# Altium PCB SDR_PCB_V2.PcbDoc
Units mm, origin at the board's own origin, x right, y up, seen from the top; angles counter-clockwise.
Board outline 269.49 x 156.72 mm, 2 copper layers (Top Layer, Bottom Layer); 57 components, 87 nets, 305 pads, 3 vias.
Unrouted connection lines stored in the file: 1.
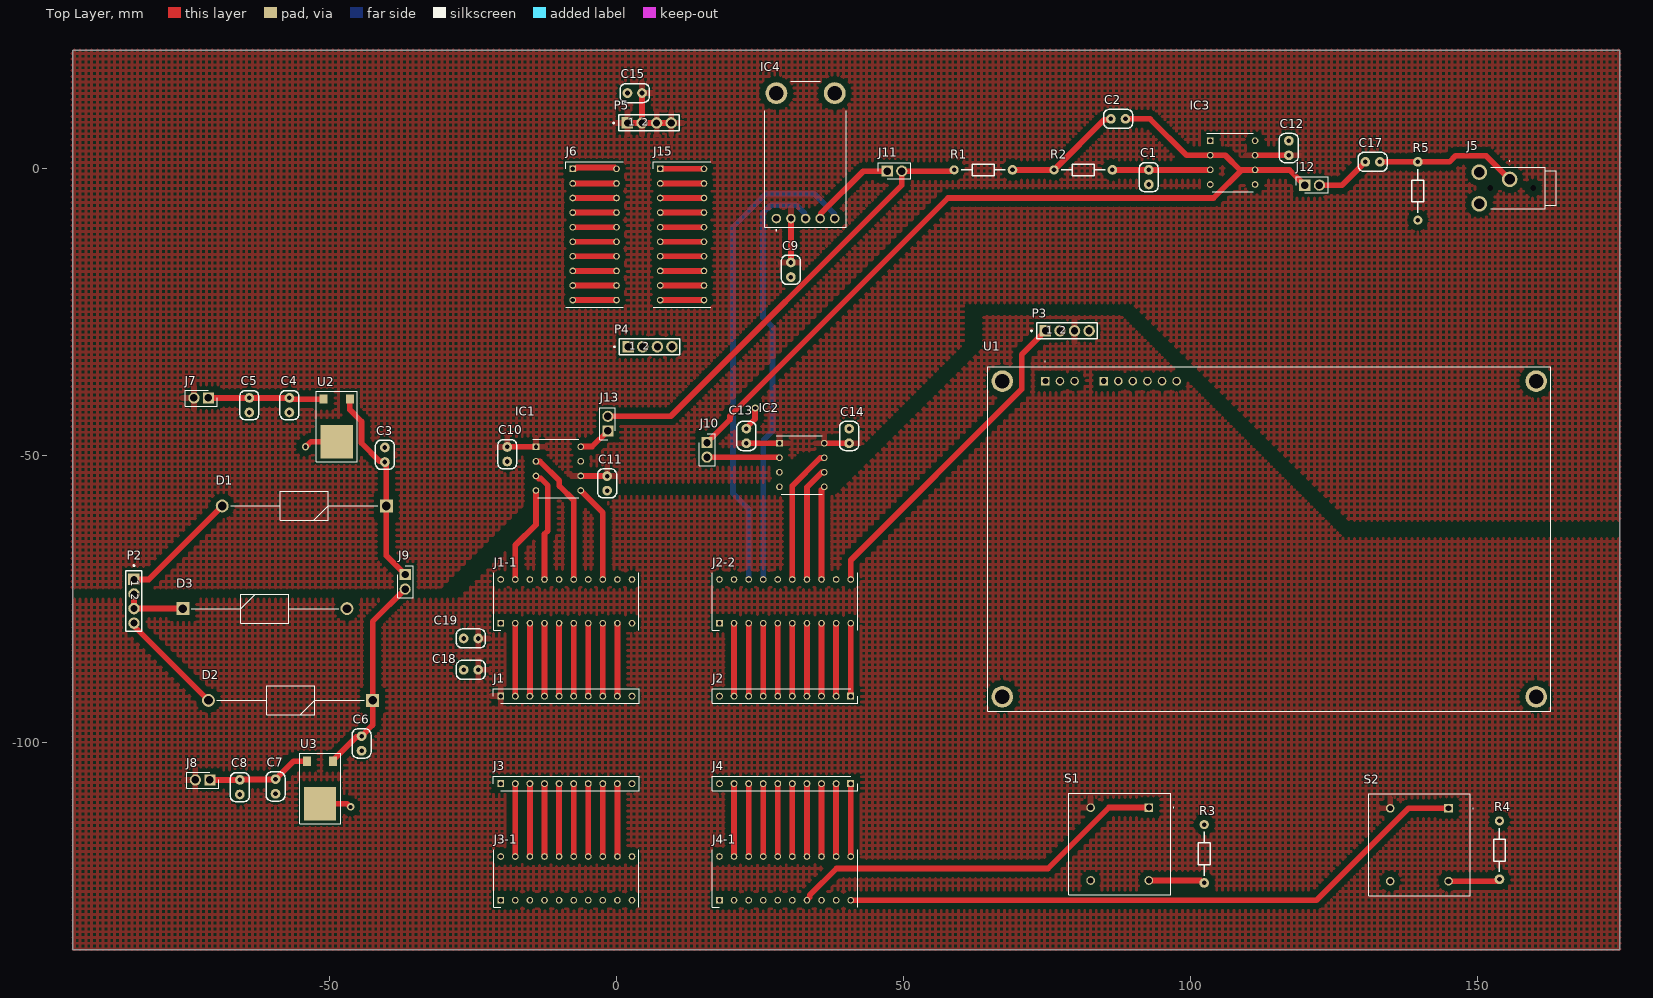
[diagram p0: Top Layer view]
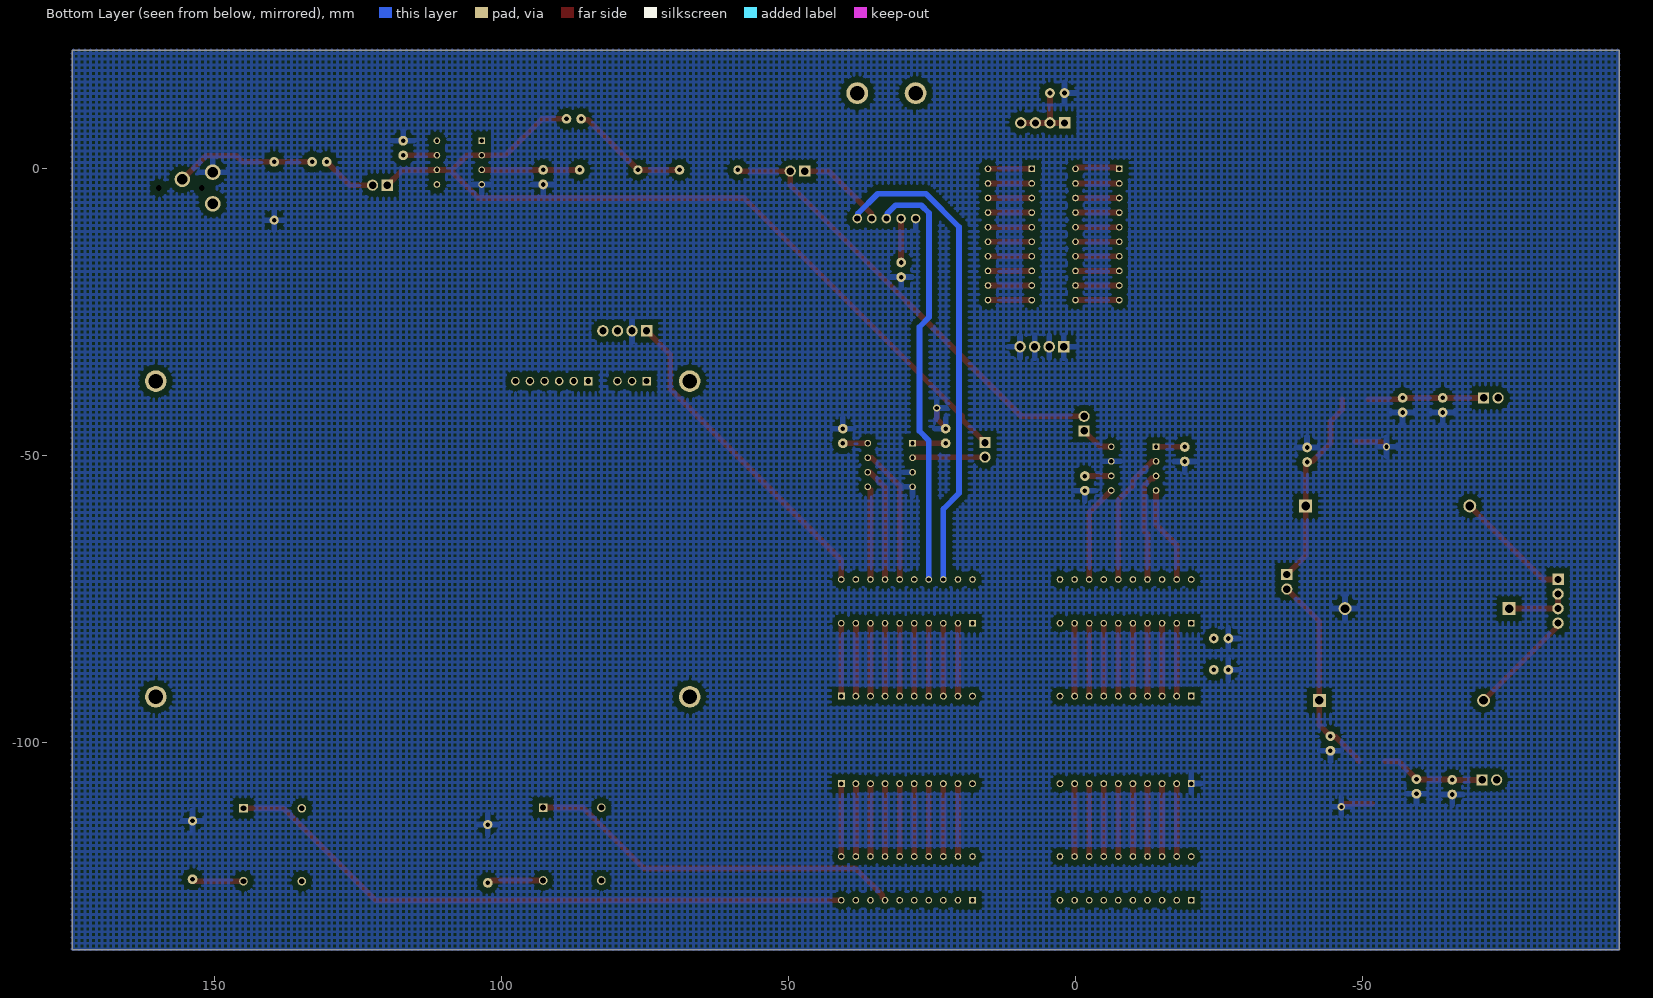
[diagram p1: Bottom Layer view, seen from below]

## Layer stack, top to bottom
Top Solder: solder mask 0.0102, Solder Resist, Dk 3.5
Top Layer: signal copper 0.0356
Dielectric 1: dielectric 0.32, FR-4, Dk 4.8
Bottom Layer: signal copper 0.0356
Bottom Solder: solder mask 0.0102, Solder Resist, Dk 3.5

## Board outline
-94.708,-136.036 174.786,-136.036 174.786,20.682 -94.708,20.682

## Design rules (kind name [scope] priority, off if disabled: settings)
Clearance [All] p1: gap=1 ignorepadtopadclearanceinfootprint=FALSE
ComponentClearance [All] p1: gap=0.3 collisioncheckmode=3 verticalgap=0.3 showdistances=FALSE
DiffPairsRouting [All] p1: maxlimit=1 minlimit=0.3 mostfreqgap=0.3 toplayer_minwidth=0.381 toplayer_maxwidth=0.381 toplayer_prefwidth=0.381 bottomlayer_minwidth=0.381 bottomlayer_maxwidth=0.381 bottomlayer_prefwidth=0.381 maxuncoupledlength=12.7
HoleSize [All] p1: absolutevalues=TRUE maxlimit=2.54 minlimit=0.6 maxpercent=80.000 minpercent=20.000
HoleToHoleClearance [All] p1: gap=0.3 allowstackedmicrovias=TRUE
PlaneClearance [All] p1: clearance=1
PlaneConnect [All] p1: planeconnectstyle=Relief reliefexpansion=1 reliefentries=4 reliefconductorwidth=1 reliefairgap=1
PolygonConnect [All] p1: connectstyle=Relief reliefconductorwidth=1 reliefentries=4 polygonreliefangle="90 Angle" airgapwidth=1
RoutingVias [All] p1: holewidth=0.711 width=1.27 viastyle="Through Hole" minholewidth=0.711 minwidth=1.27 maxholewidth=0.711 maxwidth=1.27
SolderMaskExpansion [All] p1: expansion=0.102 istentingtop=FALSE
Width [All] p1: maxlimit=2 minlimit=0.6 preferedwidth=1
24 further rules are at their usual default settings.

## Components (designator, comment, footprint, x,y, rotation, side; value= is the part's Value field where it differs from the comment)
C1 "4.7nF" CAPACITOR_100NF_TH 92.725,-2.72 r90 top
C2 "12nF" CAPACITOR_100NF_TH 86.121,8.71 r0 top
C3 "10u" CAPACITOR_100NF_TH -40.352,-48.533 r270 top
C4 "10u" CAPACITOR_100NF_TH -56.989,-42.437 r90 top
C5 "100n" CAPACITOR_100NF_TH -63.974,-42.437 r90 top
C6 "10u" CAPACITOR_100NF_TH -44.416,-101.365 r90 top
C7 "10u" CAPACITOR_100NF_TH -59.402,-108.858 r90 top
C8 "100n" CAPACITOR_100NF_TH -65.625,-108.985 r90 top
C9 "100n" CAPACITOR_100NF_TH 30.368,-16.309 r270 top
C10 "100n" CAPACITOR_100NF_TH -19.035,-48.44 r270 top
C11 "100n" CAPACITOR_100NF_TH -1.636,-56.06 r90 top
C12 "100n" CAPACITOR_100NF_TH 117.109,4.9 r270 top
C13 "100n" CAPACITOR_100NF_TH 22.621,-47.805 r90 top
C14 "100n" CAPACITOR_100NF_TH 40.528,-47.805 r90 top
C15 "100n" CAPACITOR_100NF_TH 1.905,13.208 r0 top
C17 "10u" CAPACITOR_100NF_TH 132.984,1.217 r180 top
C18 "100n" CAPACITOR_100NF_TH -26.636,-87.268 r0 top
C19 "10u" CAPACITOR_100NF_TH -26.636,-81.807 r0 top
D1 "SB350-E3_54" DIOAD2855W132L835D505 -40.092,-58.727 r180 top
D2 "SB350-E3_54" DIOAD2855W132L835D505 -42.486,-92.602 r180 top
D3 "SB350-E3_54" DIOAD2855W132L835D505 -75.556,-76.6 r0 top
IC1 "MCP4921-E_P" DIP781W56P254L950H533Q8N -10.134,-52.225 r0 top
IC2 "MCP3201-CI_P" DIP781W56P254L950H533Q8N 32.284,-51.59 r0 top
IC3 "MCP6231-E_P" DIP781W56P254L950H533Q8N 107.33,1.09 r0 top
IC4 "1713" 1713 32.927,15.221 r90 top
J1 "801-87-010-10-001101" RHDR10W60P0X254_1X10_2540X254X700P -20.167,-91.849 r0 top
J1-1 "D2820-42" DIPS762W53P254L2520H420Q20N -20.167,-79.149 r90 top
J2 "801-87-010-10-001101" RHDR10W60P0X254_1X10_2540X254X700P 40.793,-91.849 r180 top
J2-2 "D2820-42" DIPS762W53P254L2520H420Q20N 17.933,-79.149 r90 top
J3 "801-87-010-10-001101" RHDR10W60P0X254_1X10_2540X254X700P -20.167,-107.089 r0 top
J3-1 "D2820-42" DIPS762W53P254L2520H420Q20N -20.167,-127.409 r90 top
J4 "801-87-010-10-001101" RHDR10W60P0X254_1X10_2540X254X700P 40.793,-107.089 r180 top
J4-1 "D2820-42" DIPS762W53P254L2520H420Q20N 17.933,-127.409 r90 top
J5 "STX-3000" STX3000 155.59,-1.831 r180 top
J6 "D2820-42" DIPS762W53P254L2520H420Q20N -7.62,0 r0 top
J7 "MKK1X2" RHDR2W79P0X254_1X2_559X241X851P -71.086,-39.897 r180 top
J8 "MKK1X2" RHDR2W79P0X254_1X2_559X241X851P -70.832,-106.445 r180 top
J9 "MKK1X2" RHDR2W79P0X254_1X2_559X241X851P -36.815,-70.665 r270 top
J10 "MKK1X2" RHDR2W79P0X254_1X2_559X241X851P 15.763,-47.678 r270 top
J11 "MKK1X2" RHDR2W79P0X254_1X2_559X241X851P 47.151,-0.4 r0 top
J12 "MKK1X2" RHDR2W79P0X254_1X2_559X241X851P 119.903,-2.847 r0 top
J13 "MKK1X2" RHDR2W79P0X254_1X2_559X241X851P -1.509,-45.646 r90 top
J15 "D2820-42" DIPS762W53P254L2520H420Q20N 7.62,0 r0 top
P2 "UART and Power" HDH1X4 1169.171,-1322.597 r270 top
P3 "UART and Power" HDH1X4 1325.787,1225.023 r0 top
P4 "UART and Power" HDH1X4 1253.109,1222.248 r0 top
P5 "UART and Power" HDH1X4 1252.982,1261.237 r0 top
R1 "Resistor (IO board)" RESISTOR_10K_TH_QW 58.816,-0.18 r0 top
R2 "Resistor (IO board)" RESISTOR_10K_TH_QW 76.215,-0.18 r0 top
R3 "Resistor (IO board)" RESISTOR_10K_TH_QW 102.377,-114.226 r270 top
R4 "Resistor (IO board)" RESISTOR_10K_TH_QW 153.812,-113.591 r270 top
R5 "Resistor (IO board)" RESISTOR_10K_TH_QW 139.588,-8.943 r90 top
S1 "JF15SP3G" JF15SP3G 92.744,-111.271 r0 top
S2 "JF15SP3G" JF15SP3G 144.941,-111.398 r0 top
U1 "NHD-0420D3Z-FL-GBW-V3" NHD0420D3ZFLGBWV3 74.71,-36.976 r0 top
U2 "L78M05CDT(3)" TO_252 -46.454,-40.117 r180 top
U3 "L78M05CDT(3)" TO_252 -49.356,-103.202 r180 top

## Footprints (in the part's own frame and the unit in brackets; to place one, negate y for a bottom-side part, rotate by r counter-clockwise, add the part's x,y. Pads: shape width x height; smd on the part's side, far side on the other; paste and mask are expansions set on the pad)
1713 [mm]
  round 1.665 hole 1.11: 1(-23.876,5.08) 2(-23.876,2.54) 3(-23.876,0) 4(-23.876,-2.54) 5(-23.876,-5.08)
  round 3.81 hole 2.54: MH1(-2.032,-5.08) MH2(-2.032,5.08)
  silkscreen extent -26,-7.11 0,7.11, body extent -25.4,-7.11 0,7.11, height 3.1
CAPACITOR_100NF_TH [mm]
  round 1.7 hole 0.8: 1(0,0) 2(2.54,0)
  silkscreen extent -1.27,-1.65 3.81,1.65
DIOAD2855W132L835D505 [mm]
  rect 2.25x2.25 hole 1.5: 1(0,0)
  round 2.25 hole 1.5: 2(28.6,0)
  silkscreen extent 1.48,-2.52 27.13,2.52, body extent -0.66,-2.65 29.21,2.65, height 5.29
DIP781W56P254L950H533Q8N [mm]
  rect 1.159x1.159 hole 0.759: 1(-3.905,3.81)
  round 1.159 hole 0.759: 2(-3.905,1.27) 3(-3.905,-1.27) 4(-3.905,-3.81) 5(3.905,-3.81) 6(3.905,-1.27) 7(3.905,1.27) 8(3.905,3.81)
  silkscreen extent -4.48,-5.08 3.56,5.08, body extent -7.75,-0.83 0.13,8.45, height 5.5
DIPS762W53P254L2520H420Q20N [mm]
  rect 1.15x1.15 hole 0.75: 1(0,0)
  round 1.15 hole 0.75: 2(0,-2.54) 3(0,-5.08) 4(0,-7.62) 5(0,-10.16) 6(0,-12.7) 7(0,-15.24) 8(0,-17.78) 9(0,-20.32) 10(0,-22.86) 11(7.62,-22.86) 12(7.62,-20.32) 13(7.62,-17.78) 14(7.62,-15.24) 15(7.62,-12.7) 16(7.62,-10.16) 17(7.62,-7.62) 18(7.62,-5.08) 19(7.62,-2.54) 20(7.62,0)
  silkscreen extent -1.2,-24.08 8.82,1.22, body extent -1.23,-24.1 8.79,1.2, height 4.18
HDH1X4 [mm]
  rect 2x2 hole 1.25: 1(-1251.077,-1253.236)
  round 2 hole 1.25: 2(-1248.537,-1253.236) 3(-1245.997,-1253.236) 4(-1243.457,-1253.236)
  silkscreen extent -1253.61,-1254.63 -1242.06,-1251.84
JF15SP3G [mm]
  rect 1.5x1.5 hole 1: 1(0,0)
  round 1.5 hole 1: 2(0,-12.7) 3(-10.16,0) 4(-10.16,-12.7)
  silkscreen extent -13.93,-15.2 4.3,2.5, body extent -13.93,-15.2 3.77,2.5, height 6.88
NHD0420D3ZFLGBWV3 [mm]
  rect 1.5x1.5 hole 1: J11(0,0) J21(10.16,0)
  round 1.5 hole 1: J12(2.54,0) J13(5.08,0) J22(12.7,0) J23(15.24,0) J24(17.78,0) J25(20.32,0) J26(22.86,0)
  round 3.75 hole 2.5: MH1(-7.5,-55) MH2(-7.5,0) MH3(85.5,0) MH4(85.5,-55)
  silkscreen extent -10,-57.5 88,3.45, body extent -10,-57.02 88,2.98, height 13.36
RESISTOR_10K_TH_QW [mm]
  round 1.6 hole 0.8: 1(0,0)
  round 1.7 hole 0.8: 2(10.16,0)
  silkscreen extent 1.27,-1.02 8.89,1.02
RHDR2W79P0X254_1X2_559X241X851P [mm]
  rect 1.95x1.95 hole 1.3: 1(0,0)
  round 1.95 hole 1.3: 2(2.54,0)
  silkscreen extent -1.53,-1.33 4.07,1.45, body extent -1.53,-1.2 4.07,1.2, height 8.51
RHDR10W60P0X254_1X10_2540X254X700P [mm]
  rect 1.2x1.2 hole 0.8: 1(0,0)
  round 1.2 hole 0.8: 2(2.54,0) 3(5.08,0) 4(7.62,0) 5(10.16,0) 6(12.7,0) 7(15.24,0) 8(17.78,0) 9(20.32,0) 10(22.86,0)
  silkscreen extent -1.27,-1.27 24.13,1.27, body extent -1.27,-1.27 24.13,1.27, height 7
STX3000 [mm]
  round 2.704 hole 1.803: 1(0,0) 2(5.3,4.25) 3(5.3,-1.25)
  round 0.5 hole 1 unplated: MH1(-4.1,1.5) MH2(3.4,1.5)
  silkscreen extent -8.1,-3.25 3.3,5.1, body extent -8.15,-2.06 5.82,5.14, height 5.51
TO_252 [mm]
  rect 1.4x1.6 smd: 1(0,0) 3(4.57,0)
  rect 5.6x5.8 smd: 2(2.28,7.4)
  silkscreen extent -1.3,-1.4 5.87,10.9

## Part data
C1 C2: library part "Capacitor(IO Board)", "Capacitor 100nF"
C3 C4 C5 C6 C7 C8 C9 C10 C11 C12 C13 C14 C15 C17 C18 C19: library part "Capacitor(IO Board)", "Capacitor 10u 25V tant"
D1 D2 D3: "Diode", Arrow Part Number=SB350-E3/54, Manufacturer_Name=Vishay, Mouser Part Number=625-SB350-E3/54, Arrow Price/Stock=https://www.arrow.com/en/products/sb350-e354/vishay?utm_currency=USD&region=europe, Datasheet Link=https://ms.componentsearchengine.com/Datasheets/2/SB350-E3_54.pdf, Manufacturer_Part_Number=SB350-E3/54, Mouser Price/Stock=https://www.mouser.co.uk/ProductDetail/Vishay-General-Semiconductor/SB350-E3-54?qs=u91jd7aysvP1Ohy47XJYyw%3D%3D
IC1: "Integrated Circuit", Arrow Part Number=MCP4921-E/P, Manufacturer_Name=Microchip, Mouser Part Number=579-MCP4921-E/P, Arrow Price/Stock=https://www.arrow.com/en/products/mcp4921-ep/microchip-technology?utm_currency=USD&region=nac, Datasheet Link=https://datasheet.datasheetarchive.com/originals/distributors/SFDatasheet-4/sf-00090085.pdf, Height=5.334mm, Manufacturer_Part_Number=MCP4921-E/P, Mouser Price/Stock=https://www.mouser.co.uk/ProductDetail/Microchip-Technology/MCP4921-E-P?qs=1zyQUV6YKYz%252BhdPnOOm6sg%3D%3D
IC2: "Integrated Circuit", Arrow Part Number=MCP3201-CI/P, Manufacturer_Name=Microchip, Mouser Part Number=579-MCP3201-CI/P, Arrow Price/Stock=https://www.arrow.com/en/products/mcp3201-cip/microchip-technology?utm_currency=USD&region=nac, Datasheet Link=http://uk.rs-online.com/web/p/products/3792386, Height=5.334mm, Manufacturer_Part_Number=MCP3201-CI/P, Mouser Price/Stock=https://www.mouser.co.uk/ProductDetail/Microchip-Technology/MCP3201-CI-P?qs=mcPJWgAPNre%2FsJDHtNvcCw%3D%3D
IC3: "Integrated Circuit", Arrow Part Number=MCP6231-E/P, Manufacturer_Name=Microchip, Mouser Part Number=579-MCP6231-E/P, Arrow Price/Stock=https://www.arrow.com/en/products/mcp6231-ep/microchip-technology?region=nac, Datasheet Link=https://ww1.microchip.com/downloads/en/DeviceDoc/20001881G%20MCP6231-20%20uA%20300%20kHz%20Rail-to-Rail%20Op%20Amp.pdf, Height=5.334mm, Manufacturer_Part_Number=MCP6231-E/P, Mouser Price/Stock=https://www.mouser.co.uk/ProductDetail/Microchip-Technology/MCP6231-E-P?qs=gZwDaUDMhIfJIVq4F%252Btnbg%3D%3D
IC4: "Integrated Circuit", Manufacturer_Name=Adafruit, Mouser Part Number=485-1713, Arrow Part Number=1713, Arrow Price/Stock=https://www.arrow.com/en/products/1713/adafruit-industries?utm_currency=USD&region=nac, Datasheet Link=https://learn.adafruit.com/downloads/pdf/adafruit-agc-electret-microphone-amplifier-max9814.pdf, Height=3mm, Manufacturer_Part_Number=1713, Mouser Price/Stock=https://www.mouser.co.uk/ProductDetail/Adafruit/1713?qs=GURawfaeGuArxgrgUGiqIw%3D%3D
J1 J2 J3 J4: "Connector", Manufacturer_Name=Preci-Dip, Mouser Part Number=437-8018701010001101, Arrow Part Number=801-87-010-10-001101, Arrow Price/Stock=https://www.arrow.com/en/products/801-87-010-10-001101/preci-dip-sa, Datasheet Link=http://www.precidip.com/AppHost/9696,1/Scripts/Modules/Catalog/Default.aspx?c=7&i=310&p=107&pdf=1&dsku=801-PP-NNN-10-001101, Height=7mm, Manufacturer_Part_Number=801-87-010-10-001101, Mouser Price/Stock=https://www.mouser.co.uk/ProductDetail/Preci-dip/801-87-010-10-001101?qs=FtMuP6KVi2QQbG5SyYm4QA%3D%3D
J1-1 J2-2 J3-1 J4-1 J6 J15: "Connector", Manufacturer_Name=Harwin, Mouser Part Number=855-D2820-42, Datasheet Link=https://content.harwin.com/m/dcb15e5e8b2dbbaf/original/DRG-00111-Technical-Drawing-Datasheet-D2XXX-pdf.pdf, Height=4.2mm, Manufacturer_Part_Number=D2820-42, Mouser Price/Stock=https://www.mouser.co.uk/ProductDetail/Harwin/D2820-42?qs=ecHgFjcWJS%252B%252BgOfYBxqHag%3D%3D
J5: "Connector", Manufacturer_Name=Kycon, Mouser Part Number=806-STX-3000, Datasheet Link=http://www.kycon.com/Pub_Eng_Draw/STX-3000.pdf, Manufacturer_Part_Number=STX-3000, Mouser Price/Stock=https://www.mouser.co.uk/ProductDetail/Kycon/STX-3000?qs=kjZ2mQLP346Nbz1X9BOzfg%3D%3D
J7 J8 J9 J10 J11 J12 J13: library part SOCKET(2), "2-Way Socket", Part Number=143-126, Supplier=Farnell
P2 P3 P4 P5: library part "Header 4", "Header, 4-Pin", LatestRevisionDate=17-Jul-2002, LatestRevisionNote="Re-released for DXP Platform.", Publisher="Altium Limited"
R1 R2 R3 R4 R5: library part "Resistor(IO board)", "Resistor (SFR25)"
S1 S2: "Switch (4-Pin Push)", Manufacturer_Name="NKK Switches", Mouser Part Number=633-JF15SP3G, Datasheet Link=https://www.nkkswitches.com/pdf/JFnonilluminated-1.pdf, Height=6.78mm, Manufacturer_Part_Number=JF15SP3G, Mouser Price/Stock=https://www.mouser.co.uk/ProductDetail/NKK-Switches/JF15SP3G?qs=C5yZ6ouz9zMC%252Bh3z2Fkoaw%3D%3D
U1: "Undefined or Miscellaneous", Manufacturer_Name="Newhaven Display", Mouser Part Number=763-0420D3ZFLGBW-V3, Datasheet Link=https://componentsearchengine.com/Datasheets/1/NHD-0420D3Z-FL-GBW-V3.pdf, Height=9.34mm, Manufacturer_Part_Number=NHD-0420D3Z-FL-GBW-V3, Mouser Price/Stock=https://www.mouser.co.uk/ProductDetail/Newhaven-Display/NHD-0420D3Z-FL-GBW-V3?qs=qFF%252BBcFBHba4i0K1fcOqkw%3D%3D
U2 U3: library part L78M05ACDT(3), "Very Low Drop Voltage Regulators With Inhibit"

## Via types
v1: diameter 1.27, hole 0.711, Top Layer to Bottom Layer, 3 vias

## Nets (pads, with @x,y where several pads share a name; then routed paths per layer and width w, separated by ;. In a path a pad name is that pad's centre, name@x,y a point inside that pad or via, vN(x,y) a via of type N, cw(c..) or ccw(c..) an arc to the next point about the centre after c; other vN are vias at no path point)
+5V_ANLG: C9.1 C10.1 C11.2 C12.2 C13.1 C14.1 C15.2 IC1.1 IC1.6 IC2.1 IC2.8 IC3.7 IC4.2 J7.2 P5.1 P5.2 P5.3 P5.4 | length 46.1
  Top Layer w1: C10.1 -19.023,-48.428 -14.051,-48.428 IC1.1 ; IC1.6 -6.217,-53.508 -1.648,-53.508 C11.2 ; P5.1 P5.2 ; C15.2 P5.2 ; P5.4 P5.3 P5.2 ; C13.1 22.633,-47.793 28.367,-47.793 IC2.1 ; C9.1 30.378,-16.3 30.378,-8.665 IC4.2 ; IC2.8 36.201,-47.793 40.516,-47.793 C14.1 ; IC3.7 C12.2
+5V_DIG: C18.2 C19.2 J1.1 J8.2 P3.3 S1.3 S2.3
FPGA_1: IC4.3 J2-2.17 | length 74.6
  Bottom Layer w1: J2-2.17 25.553,-47.326 27.188,-45.691 27.188,-27.527 25.515,-25.853 25.515,-7.689 26.881,-6.323 31.353,-6.323 32.8,-7.769 32.8,-8.528 IC4.3
FPGA_2: IC4.5 J2-2.18 | length 84.9
  Bottom Layer w1: J2-2.18 23.013,-59.261 20.271,-56.519 20.271,-10.104 26.052,-4.323 34.433,-4.323 37.88,-7.769 37.88,-8.528 IC4.5
FPGA_3: IC1.5 J1-1.13 | length 17.1
  Top Layer w1: IC1.5 -2.387,-59.877 J1-1.13
FPGA_4: IC1.4 J1-1.19 | length 17
  Top Layer w1: J1-1.19 -17.627,-65.577 -14.039,-61.989 IC1.4
FPGA_5: IC2.7 J2-2.15 | length 23.9
  Top Layer w1: J2-2.15 30.633,-55.187 35.469,-50.351 36.159,-50.351 IC2.7
FPGA_6: IC1.2 J1-1.15 | length 23.7
  Top Layer w1: IC1.2 -14.008,-50.986 -13.319,-50.986 -9.959,-54.345 -9.959,-55.246 -7.467,-57.738 J1-1.15
FPGA_7: IC2.5 J2-2.13 | length 16.3
  Top Layer w1: J2-2.13 35.713,-55.919 36.189,-55.443 IC2.5
FPGA_8: IC2.6 J2-2.14 | length 20.2
  Top Layer w1: J2-2.14 33.173,-55.475 35.758,-52.891 36.159,-52.891 IC2.6
FPGA_9: J4-1.7 S1.1 | length 66.5
  Top Layer w1: J4-1.7 33.173,-127.369 33.638,-126.904 33.638,-126.55 38.324,-121.864 75.173,-121.864 85.766,-111.271 S1.1
FPGA_10: J4-1.10 S2.1 | length 110.8
  Top Layer w1: J4-1.10 121.952,-127.409 137.963,-111.398 S2.1
FPGA_11: J2-2.11 P3.1 | length 57.4
  Top Layer w1: J2-2.11 40.793,-68.166 70.585,-38.374 70.585,-32.338 P3.1
FPGA_12: IC1.3 J1-1.17 | length 19.4
  Top Layer w1: IC1.3 -13.996,-53.495 -13.535,-53.956 -13.178,-53.956 -11.959,-55.174 -11.959,-63.038 -12.547,-63.625 J1-1.17
GND: C1.1 C3.1 C4.1 C5.1 C6.1 C7.1 C8.1 C9.2 C10.2 C11.1 C12.1 C13.2 C14.2 C15.1 C18.1 C19.1 D3.2 IC1.7 IC2.3 IC2.4 IC3.4 IC4.1 J3.1 J5.3 P3.2 P4.1 P4.2 P4.3 P4.4 R3.1 R4.1 R5.1 U2.2 U3.2 | length 15.6
  Top Layer w1: v1(-54.195,-48.406) -54.122,-48.406 -53.233,-47.517 U2.2 ; U3.2 -46.936,-110.602 -46.394,-111.144 v1(-46.321,-111.144) ; C13.2 22.621,-45.076 24.112,-43.584 24.112,-41.727 v1(24.164,-41.675)
NetC1_2: C1.2 IC3.3 R2.2 | length 17
  Top Layer w1: R2.2 C1.2 IC3.3
NetC2_1: C2.1 R1.2 R2.1 | length 21.1
  Top Layer w1: R1.2 R2.1 76.342,-0.18 R2.1@76.411,-0.249 ; R2.1@76.469,-0.307 R2.1@76.411,-0.249 ; C2.1 85.987,8.576 84.971,8.576 76.411,0.016 R2.1@76.411,-0.249
NetC2_2: C2.2 IC3.2 IC3.6 J10.1 J12.1 | length 149.2
  Top Layer w1: J10.1 19.759,-43.682 19.759,-43.061 57.75,-5.07 104.016,-5.07 108.906,-0.18 ; C2.2 92.941,8.71 99.291,2.36 IC3.2 106.06,2.36 108.6,-0.18 108.906,-0.18 ; J12.1 117.236,-0.18 IC3.6 108.906,-0.18
NetC3_2: C3.2 D1.1 J9.1 U2.1 | length 35
  Top Layer w1: U2.1 -46.454,-41.976 -44.434,-43.996 -44.434,-47.774 -41.269,-50.939 -40.486,-50.939 C3.2 -40.352,-51.262 -40.092,-51.522 D1.1 -40.092,-67.388 J9.1
NetC4_2: C4.2 C5.2 J7.1 U2.3 | length 20.2
  Top Layer w1: J7.1 C5.2 C4.2 -56.8,-39.897 -56.58,-40.117 U2.3
NetC6_2: C6.2 D2.1 J9.2 U3.1 | length 35.8
  Top Layer w1: U3.1 -49.156,-103.002 -49.156,-102.782 -45.333,-98.959 -44.55,-98.959 C6.2 -42.486,-96.895 D2.1 -42.486,-78.876 J9.2 J9.2@-36.675,-73.345
NetC7_2: C7.2 C8.2 J8.1 U3.3 | length 18.2
  Top Layer w1: J8.1 C8.2 -65.561,-106.382 -59.465,-106.382 C7.2 -56.286,-103.202 U3.3
NetC17_1: C17.1 J5.1 R5.2 | length 24.7
  Top Layer w1: C17.1 R5.2 145.097,1.217 146.151,2.271 151.488,2.271 J5.1
NetC17_2: C17.2 J12.2 | length 9.7
  Top Layer w1: J12.2 126.38,-2.847 C17.2
NetD1_2: D1.2 P2.1 | length 20.7
  Top Layer w1: P2.1 -81.485,-71.52 D1.2
NetD2_2: D2.2 P2.4 | length 18.8
  Top Layer w1: P2.4 -83.874,-79.331 -83.874,-79.814 D2.2
NetD3_1: D3.1 P2.2 P2.3 | length 11.1
  Top Layer w1: P2.2@-84.025,-74.1 P2.2 P2.3 D3.1
NetIC1_8: IC1.8 J13.1 | length 5.9
  Top Layer w1: IC1.8 -6.198,-48.385 -4.248,-48.385 J13.1
NetIC2_2: IC2.2 J10.2 | length 12.7
  Top Layer w1: J10.2 28.234,-50.218 28.336,-50.32 IC2.2
NetIC4_4: IC4.4 J11.1 | length 15.5
  Top Layer w1: IC4.4 35.594,-8.528 35.594,-7.769 42.963,-0.4 J11.1
NetJ1-1_2: J1-1.2 J1.2 | length 12.7
  Top Layer w1: J1.2 J1-1.2
NetJ1-1_3: J1-1.3 J1.3 | length 12.7
  Top Layer w1: J1.3 J1-1.3
NetJ1-1_4: J1-1.4 J1.4 | length 12.7
  Top Layer w1: J1.4 J1-1.4
NetJ1-1_5: J1-1.5 J1.5 | length 12.7
  Top Layer w1: J1.5 J1-1.5
NetJ1-1_6: J1-1.6 J1.6 | length 12.7
  Top Layer w1: J1.6 J1-1.6
NetJ1-1_7: J1-1.7 J1.7 | length 12.7
  Top Layer w1: J1.7 J1-1.7
NetJ1-1_8: J1-1.8 J1.8 | length 12.7
  Top Layer w1: J1.8 J1-1.8
NetJ1-1_9: J1-1.9 J1.9 | length 12.7
  Top Layer w1: J1.9 J1-1.9
NetJ2-2_2: J2-2.2 J2.9 | length 12.7
  Top Layer w1: J2.9 J2-2.2
NetJ2-2_3: J2-2.3 J2.8 | length 12.7
  Top Layer w1: J2.8 J2-2.3
NetJ2-2_4: J2-2.4 J2.7 | length 12.7
  Top Layer w1: J2.7 J2-2.4
NetJ2-2_5: J2-2.5 J2.6 | length 12.7
  Top Layer w1: J2.6 J2-2.5
NetJ2-2_6: J2-2.6 J2.5 | length 12.7
  Top Layer w1: J2.5 J2-2.6
NetJ2-2_7: J2-2.7 J2.4 | length 12.7
  Top Layer w1: J2.4 J2-2.7
NetJ2-2_8: J2-2.8 J2.3 | length 12.7
  Top Layer w1: J2.3 J2-2.8
NetJ2-2_9: J2-2.9 J2.2 | length 12.7
  Top Layer w1: J2.2 J2-2.9
NetJ2-2_10: J2-2.10 J2.1 | length 12.7
  Top Layer w1: J2.1 J2-2.10
NetJ3-1_12: J3-1.12 J3.9 | length 12.7
  Top Layer w1: J3-1.12 J3.9
NetJ3-1_13: J3-1.13 J3.8 | length 12.7
  Top Layer w1: J3-1.13 J3.8
NetJ3-1_14: J3-1.14 J3.7 | length 12.7
  Top Layer w1: J3-1.14 J3.7
NetJ3-1_15: J3-1.15 J3.6 | length 12.7
  Top Layer w1: J3-1.15 J3.6
NetJ3-1_16: J3-1.16 J3.5 | length 12.7
  Top Layer w1: J3-1.16 J3.5
NetJ3-1_17: J3-1.17 J3.4 | length 12.7
  Top Layer w1: J3-1.17 J3.4
NetJ3-1_18: J3-1.18 J3.3 | length 12.7
  Top Layer w1: J3-1.18 J3.3
NetJ3-1_19: J3-1.19 J3.2 | length 12.7
  Top Layer w1: J3-1.19 J3.2
NetJ4-1_11: J4-1.11 J4.1 | length 12.7
  Top Layer w1: J4-1.11 J4.1
NetJ4-1_12: J4-1.12 J4.2 | length 12.7
  Top Layer w1: J4-1.12 J4.2
NetJ4-1_13: J4-1.13 J4.3 | length 12.7
  Top Layer w1: J4-1.13 J4.3
NetJ4-1_14: J4-1.14 J4.4 | length 12.7
  Top Layer w1: J4-1.14 J4.4
NetJ4-1_15: J4-1.15 J4.5 | length 12.7
  Top Layer w1: J4-1.15 J4.5
NetJ4-1_16: J4-1.16 J4.6 | length 12.7
  Top Layer w1: J4-1.16 J4.6
NetJ4-1_17: J4-1.17 J4.7 | length 12.7
  Top Layer w1: J4-1.17 J4.7
NetJ4-1_18: J4-1.18 J4.8 | length 12.7
  Top Layer w1: J4-1.18 J4.8
NetJ4-1_19: J4-1.19 J4.9 | length 12.7
  Top Layer w1: J4-1.19 J4.9
NetJ6_1: J6.1 J6.20 | length 7.8
  Top Layer w1: J6.1 -7.545,0.075 -7.138,0.075 -6.959,0.254 -0.295,0.254 -0.041,0 J6.20
NetJ6_2: J6.2 J6.19 | length 7.6
  Top Layer w1: J6.2 J6.19
NetJ6_3: J6.3 J6.18 | length 7.6
  Top Layer w1: J6.3 J6.18
NetJ6_4: J6.4 J6.17 | length 7.6
  Top Layer w1: J6.4 J6.17
NetJ6_5: J6.5 J6.16 | length 7.6
  Top Layer w1: J6.5 J6.16
NetJ6_6: J6.6 J6.15 | length 7.6
  Top Layer w1: J6.6 J6.15
NetJ6_7: J6.7 J6.14 | length 7.6
  Top Layer w1: J6.7 J6.14
NetJ6_8: J6.8 J6.13 | length 7.6
  Top Layer w1: J6.8 J6.13
NetJ6_9: J6.9 J6.12 | length 7.6
  Top Layer w1: J6.9 J6.12
NetJ6_10: J6.10 J6.11 | length 7.6
  Top Layer w1: J6.10 J6.11
NetJ11_2: J11.2 J13.2 R1.1 | length 79.6
  Top Layer w1: J13.2 9.434,-43.106 49.665,-2.875 49.665,-0.426 J11.2 58.434,-0.4 58.654,-0.18 R1.1 R1.1@58.753,-0.117
NetJ15_1: J15.1 J15.20 | length 7.6
  Top Layer w1: J15.1 J15.20
NetJ15_2: J15.2 J15.19 | length 7.6
  Top Layer w1: J15.2 J15.19
NetJ15_3: J15.3 J15.18 | length 7.6
  Top Layer w1: J15.3 J15.18
NetJ15_4: J15.4 J15.17 | length 7.6
  Top Layer w1: J15.4 J15.17
NetJ15_5: J15.5 J15.16 | length 7.6
  Top Layer w1: J15.5 J15.16
NetJ15_6: J15.6 J15.15 | length 7.6
  Top Layer w1: J15.6 J15.15
NetJ15_7: J15.7 J15.14 | length 7.6
  Top Layer w1: J15.7 J15.14
NetJ15_8: J15.8 J15.13 | length 7.6
  Top Layer w1: J15.8 J15.13
NetJ15_9: J15.9 J15.12 | length 7.6
  Top Layer w1: J15.9 J15.12
NetJ15_10: J15.10 J15.11 | length 7.6
  Top Layer w1: J15.10 J15.11
NetR3_2: R3.2 S1.2 | length 9.8
  Top Layer w1: S1.2 101.773,-123.971 102.188,-124.386 R3.2
NetR4_2: R4.2 S2.2 | length 9
  Top Layer w1: S2.2 153.276,-124.098 153.623,-123.751 R4.2
pads on no net: IC3.1 IC3.5 IC3.8 IC4.MH1 IC4.MH2 J1-1.1 J1-1.10 J1-1.11 J1-1.12 J1-1.14 J1-1.16 J1-1.18 J1-1.20 J1.10 J2-2.1 J2-2.12 J2-2.16 J2-2.19 J2-2.20 J2.10 J3-1.1 J3-1.2 J3-1.3 J3-1.4 J3-1.5 J3-1.6 J3-1.7 J3-1.8 J3-1.9 J3-1.10 J3-1.11 J3-1.20 J3.10 J4-1.1 J4-1.2 J4-1.3 J4-1.4 J4-1.5 J4-1.6 J4-1.8 J4-1.9 J4-1.20 J4.10 J5.2 J5.MH1 J5.MH2 P3.4 S1.4 S2.4 U1.J11 U1.J12 U1.J13 U1.J21 U1.J22 U1.J23 U1.J24 U1.J25 U1.J26 U1.MH1 U1.MH2 U1.MH3 U1.MH4

## Polygon pours and split planes (outlines as drawn)
+5V_ANLG on Top Layer "+5V_ANLG_L01_P001" (hatched 90Degree grid 1 track 0.5, pour order 1): -94.708,20.682 174.786,20.682 174.786,-61.487 174.532,-61.233 127.669,-61.233 89.823,-23.387 60.486,-23.387 60.486,-30.372 41.309,-49.549 40.928,-49.168 31.784,-49.168 26.323,-54.629 -7.205,-54.629 -12.285,-49.549 -16.222,-49.549 -16.222,-58.566 -30.7,-73.044 -94.835,-73.044 -94.835,20.555
+5V_DIG on Top Layer "+5V_DIG_L01_P002" (hatched 90Degree grid 1 track 0.5, pour order 2): 174.786,-136.036 -94.708,-136.036 -94.708,-74.949 -27.525,-74.949 -9.618,-57.042 38.134,-57.042 63.915,-31.261 63.915,-25.673 87.918,-25.673 126.653,-64.408 174.786,-64.408
GND on Bottom Layer "GND_L02_P000" (hatched 90Degree grid 1 track 0.5, pour order 0): -94.708,20.682 174.786,20.682 174.786,-136.036 -94.708,-136.036

## Silkscreen, mask and mechanical layers (free items; w line width, h text height)
Mechanical 2:
  drawing of 225 lines, arcs and shapes, not listed
Mechanical 3:
  circle w0.013: c-20.159,-91.84 r0.534
  circle w0.013: c-17.619,-91.84 r0.534
  circle w0.013: c-15.079,-91.84 r0.534
  circle w0.013: c-12.539,-91.84 r0.534
  circle w0.013: c0.161,-91.84 r0.534
  circle w0.013: c-2.379,-91.84 r0.534
  circle w0.013: c-9.999,-91.84 r0.534
  circle w0.013: c-7.459,-91.84 r0.534
  circle w0.013: c-4.919,-91.84 r0.534
  circle w0.013: c0.161,-107.08 r0.534
  circle w0.013: c-2.379,-107.08 r0.534
  circle w0.013: c-4.919,-107.08 r0.534
  circle w0.013: c-7.459,-107.08 r0.534
  circle w0.013: c-20.159,-107.08 r0.534
  circle w0.013: c-17.619,-107.08 r0.534
  circle w0.013: c-9.999,-107.08 r0.534
  circle w0.013: c-12.539,-107.08 r0.534
  circle w0.013: c-15.079,-107.08 r0.534
  circle w0.013: c17.941,-91.84 r0.534
  circle w0.013: c20.481,-91.84 r0.534
  circle w0.013: c23.021,-91.84 r0.534
  circle w0.013: c25.561,-91.84 r0.534
  circle w0.013: c38.261,-91.84 r0.534
  circle w0.013: c35.721,-91.84 r0.534
  circle w0.013: c28.101,-91.84 r0.534
  circle w0.013: c30.641,-91.84 r0.534
  circle w0.013: c33.181,-91.84 r0.534
  circle w0.013: c38.261,-107.08 r0.534
  circle w0.013: c35.721,-107.08 r0.534
  circle w0.013: c33.181,-107.08 r0.534
  circle w0.013: c30.641,-107.08 r0.534
  circle w0.013: c17.941,-107.08 r0.534
  circle w0.013: c20.481,-107.08 r0.534
  circle w0.013: c28.101,-107.08 r0.534
  circle w0.013: c25.561,-107.08 r0.534
  circle w0.013: c23.021,-107.08 r0.534
  circle w0.013: c42.091,-95.65 r0.534
  circle w0.013: c44.591,-93.11 r0.534
  circle w0.013: c44.591,-95.65 r0.534
  circle w0.013: c44.591,-98.19 r0.534
  circle w0.013: c44.591,-105.81 r0.534
  circle w0.013: c44.591,-103.27 r0.534
  circle w0.013: c44.591,-100.73 r0.534
  circle w0.013: c42.091,-100.73 r0.534
  circle w0.013: c42.091,-103.27 r0.534
  circle w0.013: c42.091,-105.81 r0.534
  circle w0.013: c42.091,-98.19 r0.534
  circle w0.013: c42.091,-93.11 r0.534
  lines w0.013: -21.525,-103.36 cw(c-21.525,-103.06) -21.525,-102.76 -20.825,-102.76 cw(c-20.825,-103.06) -20.825,-103.36 -21.525,-103.36 ; -21.525,-96.16 cw(c-21.525,-95.86) -21.525,-95.56 -20.825,-95.56 cw(c-20.825,-95.86) -20.825,-96.16 -21.525,-96.16 ; -18.625,-102.885 ccw(c-18.325,-102.885) -18.025,-102.885 -18.025,-102.635 ccw(c-18.325,-102.635) -18.625,-102.635 -18.625,-102.885 ; -18.625,-96.285 ccw(c-18.325,-96.285) -18.025,-96.285 -18.025,-96.035 ccw(c-18.325,-96.035) -18.625,-96.035 -18.625,-96.285
Mechanical 4:
  drawing of 413 lines, arcs and shapes, not listed

## Text inside footprints (layer, text, board x,y; h text height)
P2: Top Overlay "2" at -84.573,-74.035 h1.27 r270; Top Overlay "1" at -84.573,-71.672 h1.27 r270
P3: Top Overlay "2" at 77.225,-28.721 h1.27; Top Overlay "1" at 74.862,-28.721 h1.27
P4: Top Overlay "2" at 4.547,-31.496 h1.27; Top Overlay "1" at 2.184,-31.496 h1.27
P5: Top Overlay "2" at 4.42,7.493 h1.27; Top Overlay "1" at 2.057,7.493 h1.27